# Altium PCB PCB_4550.PcbDoc
Units mil, origin at the board's own origin, x right, y up, seen from the top; angles counter-clockwise.
Board outline 4520.65 x 4320 mil, 2 copper layers (Top Layer, Bottom Layer); 48 components, 76 nets, 250 pads, 83 vias.
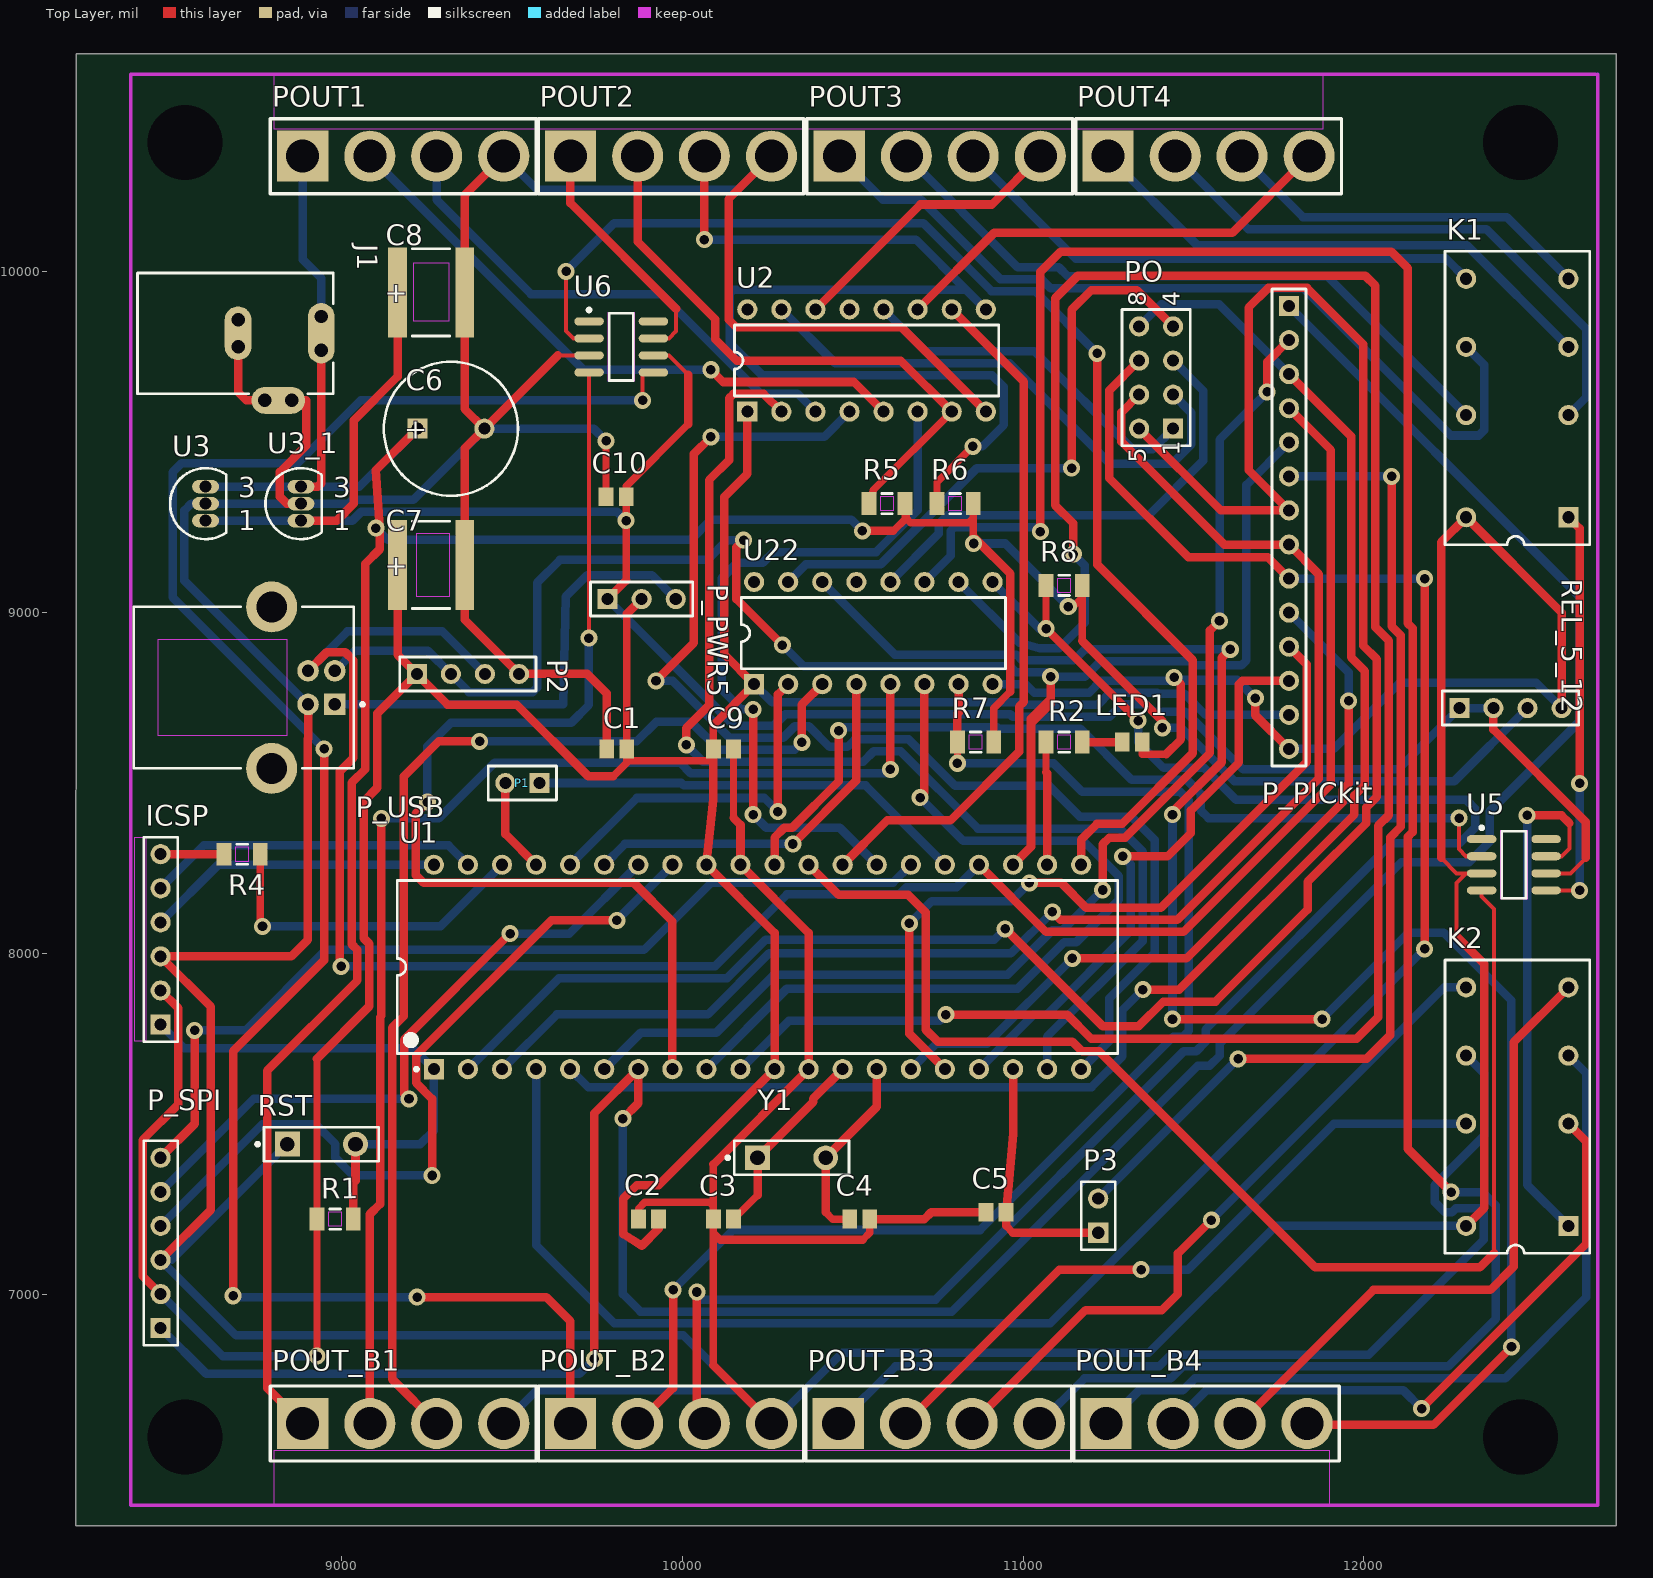
[diagram p0: Top Layer view]
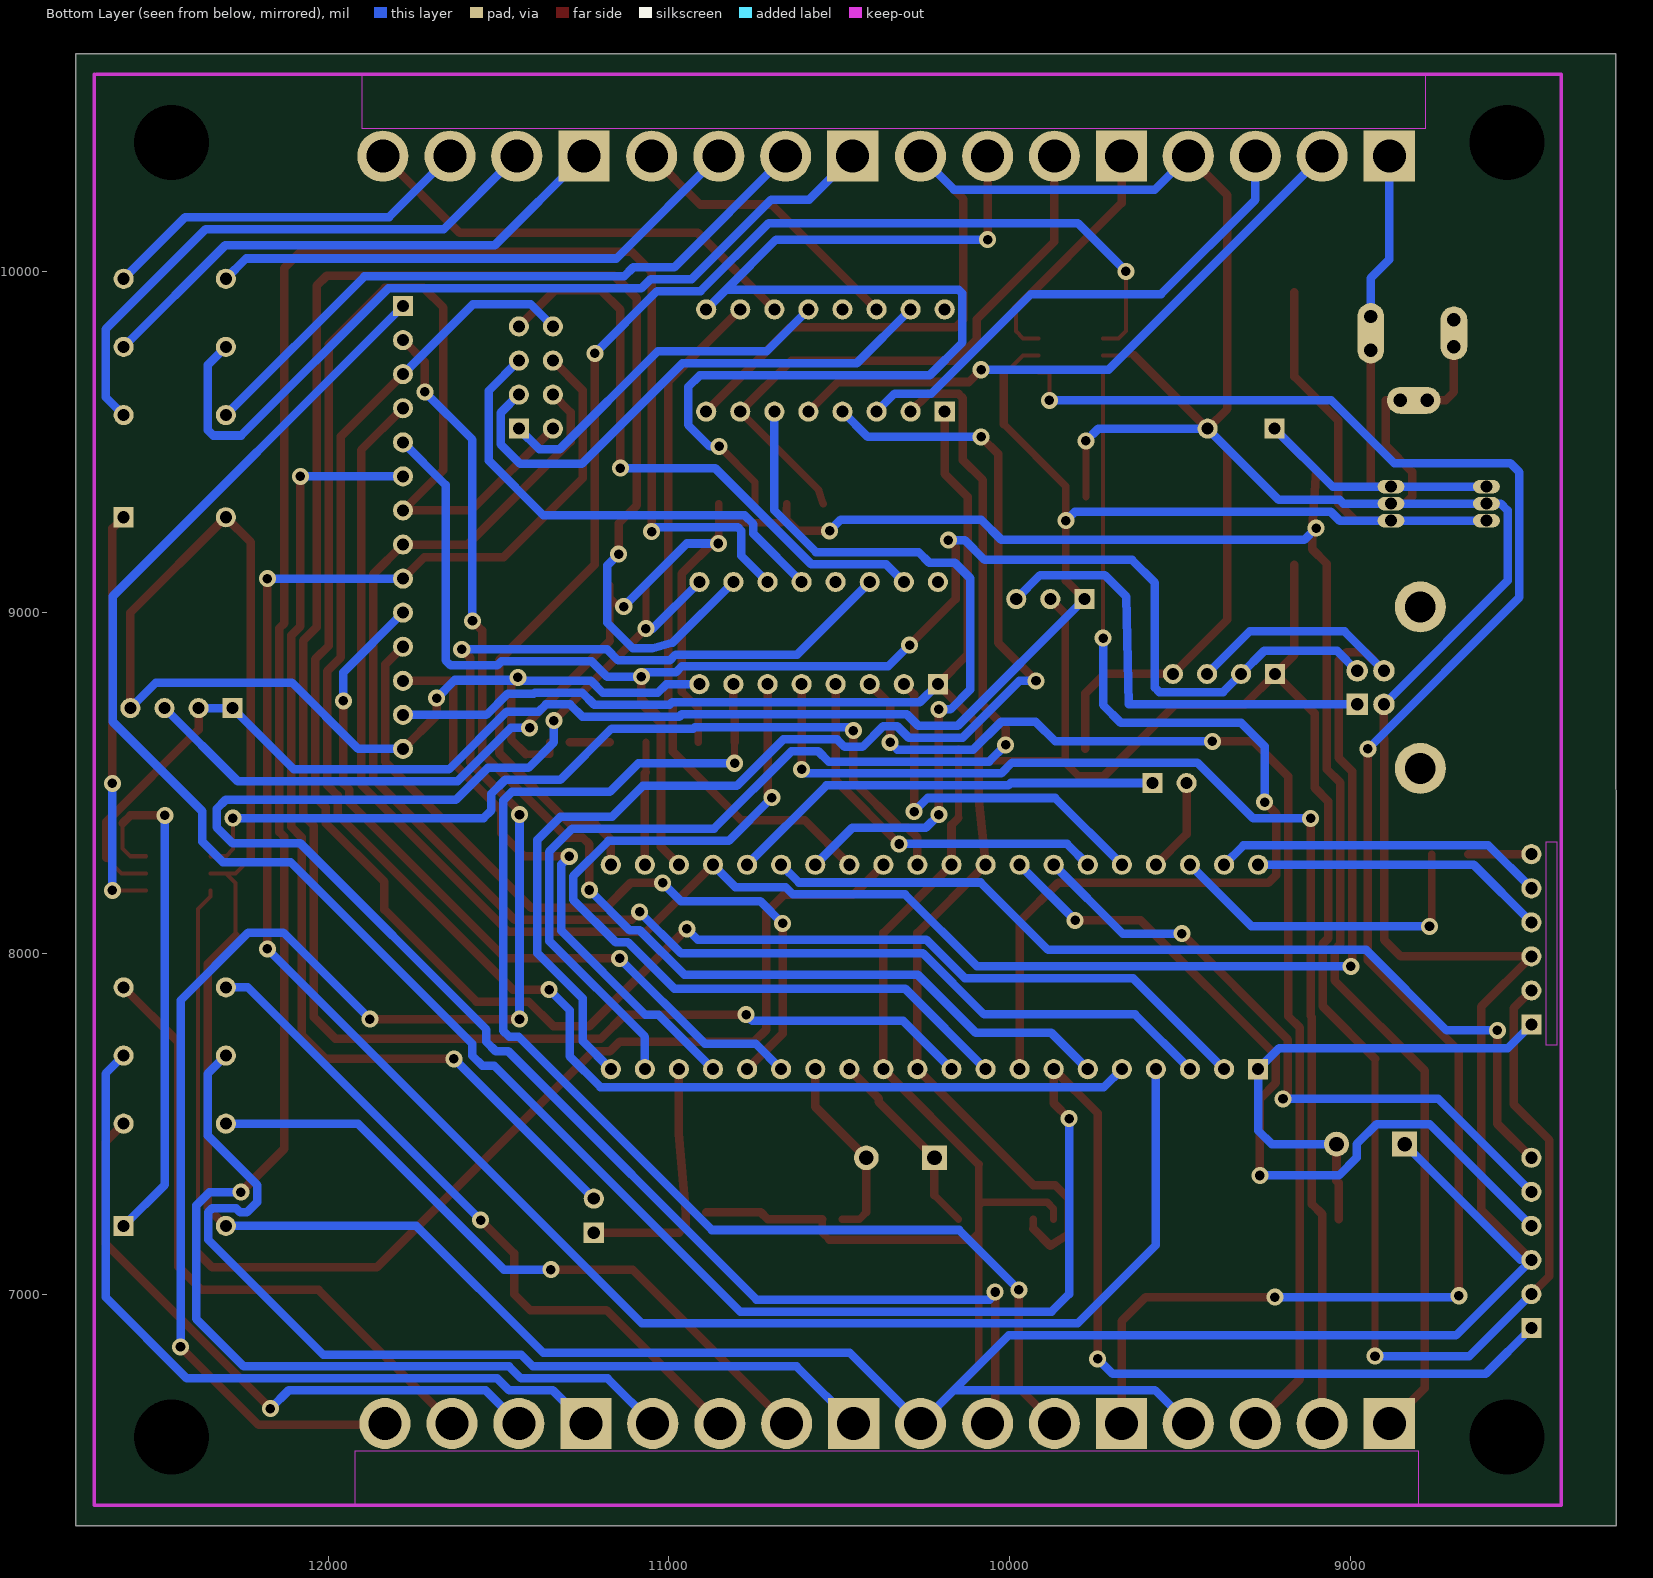
[diagram p1: Bottom Layer view, seen from below]

## Layer stack, top to bottom
Top Layer: signal copper 1.4
Dielectric: dielectric 12.6, FR-4, Dk 4.8
Bottom Layer: signal copper 1.4

## Board outline
8220,10640 12740,10640 12740,6320 8219.35,6320

## Design rules (kind name [scope] priority, off if disabled: settings)
Clearance [All] p1: gap=10
DiffPairsRouting [All] p1: maxlimit=20 minlimit=10 mostfreqgap=20 maxuncoupledlength=500
PolygonConnect [All] p1: connectstyle=Relief reliefconductorwidth=10 reliefentries=4 polygonreliefangle="90 Angle"
RoomDefinition Sheet4550_2 [InComponentClass('Sheet4550_2')] p1: confinementstyle=ConfineIn formatcopy=TRUE lockcomponents=FALSE outline 12820,8920 13960,8920 13960,8320 12820,8320
RoomDefinition Sheet4550_1 [InComponentClass('Sheet4550_1')] p2: confinementstyle=ConfineIn formatcopy=TRUE lockcomponents=FALSE outline 12800,8200 13980,8200 13980,7600 12800,7600
RoomDefinition Sheet4550 [InComponentClass('Sheet4550')] p3: confinementstyle=ConfineIn formatcopy=TRUE lockcomponents=FALSE outline 12840,7000 13920,7000 13920,7380 12840,7380
RoutingVias [All] p1: holewidth=28 width=50 viastyle="Through Hole" minholewidth=28 minwidth=50 maxholewidth=28 maxwidth=50
SMDNeckDown [All] p1: percent=50.000
SilkscreenOverComponentPads [All] p1: minsilkscreentomaskgap=10
SolderMaskExpansion [All] p1: expansion=4
ViasUnderSMD [All] p1 off: allowed=FALSE
Width [All] p1: maxlimit=25 minlimit=10 preferedwidth=25
26 further rules are at their usual default settings.

## Classes and differential pairs
component class Sheet4550: C3 C4 C5 C6 C8 C10 J1 LED1 P1 P3 P_PICkit P_SPI R2 U1 U3 U3_1 Y1
component class Sheet4550_2: B9834809 C1 C2 C7 C9 ICSP K1 K2 P2 P_PWR5 P_USB PO POUT3 POUT4 POUT_B3 POUT_B4 R1 R4 RST U5
component class Sheet4550_1: POUT1 POUT2 POUT_B1 POUT_B2 R5 R6 R7 R8 REL_5_12 U2 U6 U22

## Components (designator, comment, footprint, x,y, rotation, side; value= is the part's Value field where it differs from the comment)
C1 "100n" CAPC2012L 9806.77,8600 r0 top
C2 "100n" CAPC2012L 9900,7220 r0 top
C3 "20pF" CAPC2012L 10120,7220 r0 top
C4 "20pF" CAPC2012L 10520,7220 r180 top
C5 "470n" CAPC2012L 10920,7240 r0 top
C6 "220mF" CAPPR5-10x12.5 9320,9540 r0 top
C7 "10mF" CAPC5764L 9261.93,9140 r0 top
C8 "100mF" CAPC5764L 9261.93,9940 r0 top
C9 "100n" CAPC2012L 10120,8600 r180 top
C10 "100n" CAPC2012L 9804.87,9340 r0 top
ICSP "Header 6" HDR1X6 8468,7791 r90 top
J1 "PWR2.5" KLD-0202 8400,9820 r0 top
K1 "Relay-DPDT" DIP-16-KEY 12600,9280 r90 top
K2 "Relay-DPDT" DIP-16-KEY 12600,7200 r90 top
LED1 "LED2" CAPC2012L 11320,8620 r0 top
P1 "Header 2" HDR1X2 9580,8500 r180 top
P2 "USB" HDR1X4 9220,8820 r0 top
P3 "Header 2" HDR1X2 11220,7180 r90 top
P_PICkit "Header 14" HDR1X14 11780,9900 r270 top
P_PWR5 "Header 3" HDR1X3 9780,9040 r0 top
P_SPI "Header 6" HDR1X6 8468,6900 r90 top
P_USB "Header USB" USB2.5-2H4D 8940,8780 r180 top
PO "Header 4X2A" HDR2X4_CEN 11440,9540 r90 top
POUT1 "Big1" BIG4 8900,10340 r180 top
POUT2 "Big1" BIG4 9686,10340 r180 top
POUT3 "Big1" BIG4 10475,10340 r180 top
POUT4 "Big1" BIG4 11264,10340 r180 top
POUT_B1 "Big1" BIG4 8900,6620 r180 top
POUT_B2 "Big1" BIG4 9686,6620 r180 top
POUT_B3 "Big1" BIG4 10472,6620 r180 top
POUT_B4 "Big1" BIG4 11258,6620 r180 top
R1 "10K" RESC3216L 8980,7220 r180 top
R2 "470" RESC3216L 11120,8620 r0 top
R4 "470" RESC3216L 8707,8291 r180 top
R5 "10K" RESC3216L 10600,9320 r0 top
R6 "10K" RESC3216L 10800,9320 r0 top
R7 "10K" RESC3216L 10860,8620 r0 top
R8 "10K" RESC3216L 11120,9080 r0 top
REL_5_12 "Header 4" HDR1X4 12280,8720 r0 top
RST "SW-PB" SPST-2 8940,7440 r0 top
U1 "PIC18F4550-I/P" PDIP600-P40 10220,7960 r90 top
U2 "MC14050BCP" 648-08 10540,9740 r0 top
U3 "MC78L05ABP" 29-04 8600,9320 r0 top
U3_1 "MC78L05ABP" 29-04 8880,9320 r0 top
U5 "TC4427AEOA" SOIC-OA8_N 12440,8260 r0 top
U6 "TC4427AEOA" SOIC-OA8_N 9820,9780 r0 top
U22 "MC14050BCP" 648-08 10560,8940 r0 top
Y1 "20Mhz" SPST-2 10320,7400 r0 top

## Footprints (in the part's own frame and the unit in brackets; to place one, negate y for a bottom-side part, rotate by r counter-clockwise, add the part's x,y. Pads: shape width x height; smd on the part's side, far side on the other; paste and mask are expansions set on the pad)
29-04 [mm] "TO, Flat Index; 3 In-Line, Axial Leads; Body Dia. 4.8mm; Leads 0.48 x 0.51 mm (max)"
  oval 2x1 hole 0.9: 1(0,-1.27) 2(0,0) 3(0,1.27)
  silkscreen extent -2.65,-2.65 1.55,2.65
648-08 [mm] "DIP; 16 Leads; Row Spacing 7.62 mm; Pitch 2.54 mm"
  rect 1.5x1.5 hole 0.9: 1(-8.89,-3.81)
  round 1.5 hole 0.9: 2(-6.35,-3.81) 3(-3.81,-3.81) 4(-1.27,-3.81) 5(1.27,-3.81) 6(3.81,-3.81) 7(6.35,-3.81) 8(8.89,-3.81) 9(8.89,3.81) 10(6.35,3.81) 11(3.81,3.81) 12(1.27,3.81) 13(-1.27,3.81) 14(-3.81,3.81) 15(-6.35,3.81) 16(-8.89,3.81)
  silkscreen extent -9.85,-2.65 9.85,2.65
BIG4 [mil]
  rect 150x150 hole 97: 1(15,0)
  round 150 hole 97: 2(-182,0) 3(-378,0) 4(-575,0)
  silkscreen extent -670,-110 110,110
CAPC2012L [mm] "Chip Capacitor, Body 2.0x1.3mm, IPC High Density"
  rect 1.1x1.4 smd: 1(-0.75,0) 2(0.75,0)
  body extent -1.1,-0.72 1.1,0.72, height 1.4
CAPC5764L [mm] "Chip Capacitor, Body 5.7x6.4mm, IPC High Density"
  rect 1.4x6.7 smd: 1(-2.5,0) 2(2.5,0)
  silkscreen extent -1.4,-3.25 1.4,3.25, body extent -2.95,-3.4 2.95,3.4, height 1.4
CAPPR5-10x12.5 [mm] "Capacitor, Electrolytic, Radial; Body 10 x 12.5 mm (Dia.xH typ); Pin Spacing 5 mm (typ)"
  rect 1.5x1.5 hole 0.9: 1(-2.5,0)
  round 1.5 hole 0.9: 2(2.5,0)
  silkscreen extent -5,-5 5,5
DIP-16-KEY [mm]
  rect 1.5x1.5 hole 0.9: 1(0,0)
  round 1.5 hole 0.9: 4(7.62,0) 6(12.7,0) 8(17.78,0) 9(17.78,7.62) 11(12.7,7.62) 13(7.62,7.62) 16(0,7.62)
  silkscreen extent -2.05,-1.59 19.83,9.2
HDR1X2 [mm] "Connector; Header; 2 Position"
  rect 1.5x1.5 hole 0.9: 1(0,0)
  round 1.5 hole 0.9: 2(2.54,0)
  silkscreen extent -1.27,-1.27 3.81,1.27
HDR1X3 [mm] "Connector; Header; 3 Position"
  rect 1.5x1.5 hole 0.9: 1(0,0)
  round 1.5 hole 0.9: 2(2.54,0) 3(5.08,0)
  silkscreen extent -1.27,-1.27 6.35,1.27
HDR1X4 [mm]
  rect 1.5x1.5 hole 0.9: 1(0,0)
  round 1.5 hole 0.9: 2(2.54,0) 3(5.08,0) 4(7.62,0)
  silkscreen extent -1.27,-1.27 8.89,1.27
HDR1X6 [mm] "Connector; Header; 6 Position"
  rect 1.5x1.5 hole 0.9: 1(0,0)
  round 1.5 hole 0.9: 2(2.54,0) 3(5.08,0) 4(7.62,0) 5(10.16,0) 6(12.7,0)
  silkscreen extent -1.27,-1.27 13.97,1.27
HDR1X14 [mm] "Connector; Header; 14 Position"
  rect 1.5x1.5 hole 0.9: 1(0,0)
  round 1.5 hole 0.9: 2(2.54,0) 3(5.08,0) 4(7.62,0) 5(10.16,0) 6(12.7,0) 7(15.24,0) 8(17.78,0) 9(20.32,0) 10(22.86,0) 11(25.4,0) 12(27.94,0) 13(30.48,0) 14(33.02,0)
  silkscreen extent -1.27,-1.27 34.29,1.27
HDR2X4_CEN [mm] "Connector; Header; 4x2 Position"
  rect 1.5x1.5 hole 0.9: 1(0,0)
  round 1.5 hole 0.9: 2(2.54,0) 3(5.08,0) 4(7.62,0) 5(0,2.54) 6(2.54,2.54) 7(5.08,2.54) 8(7.62,2.54)
  silkscreen extent -1.27,-1.27 8.89,3.81
KLD-0202 [mm]
  oval 2x4.5 all layers, no hole: 1(13.7,0)
  round 1.5 hole 1: 1A(13.7,-1.25) 1B(13.7,1.25) 2A(7.5,-1) 2B(7.5,1) 3A(9.5,-5) 3B(11.5,-5)
  oval 2x4 all layers, no hole: 2(7.5,0)
  oval 4x2 all layers, no hole: 3(10.5,-5)
  silkscreen extent 0,-4.5 14.6,4.5
PDIP600-P40 [mm] "DIP, 40-Leads, Row Spacing 15.24mm, Pitch 2.54mm, Body 51.8x13.5mm"
  rect 1.5x1.5 hole 0.9: 1(-7.62,24.13)
  round 1.5 hole 0.9: 2(-7.62,21.59) 3(-7.62,19.05) 4(-7.62,16.51) 5(-7.62,13.97) 6(-7.62,11.43) 7(-7.62,8.89) 8(-7.62,6.35) 9(-7.62,3.81) 10(-7.62,1.27) 11(-7.62,-1.27) 12(-7.62,-3.81) 13(-7.62,-6.35) 14(-7.62,-8.89) 15(-7.62,-11.43) 16(-7.62,-13.97) 17(-7.62,-16.51) 18(-7.62,-19.05) 19(-7.62,-21.59) 20(-7.62,-24.13) 21(7.62,-24.13) 22(7.62,-21.59) 23(7.62,-19.05) 24(7.62,-16.51) 25(7.62,-13.97) 26(7.62,-11.43) 27(7.62,-8.89) 28(7.62,-6.35) 29(7.62,-3.81) 30(7.62,-1.27) 31(7.62,1.27) 32(7.62,3.81) 33(7.62,6.35) 34(7.62,8.89) 35(7.62,11.43) 36(7.62,13.97) 37(7.62,16.51) 38(7.62,19.05) 39(7.62,21.59) 40(7.62,24.13)
  silkscreen extent -7.74,-26.85 6.45,26.85, body extent -7.3,-26.85 7.3,26.85, height 6.35
RESC3216L [mm] "Chip Resistor, Body 3.1x1.6mm, IPC High Density"
  rect 1.1x1.7 smd: 1(-1.35,0) 2(1.35,0)
  silkscreen extent -0.4,-0.75 0.4,0.75, body extent -1.68,-0.87 1.68,0.87, height 2.54
SOIC-OA8_N [mm] "SOIC, 8-Leads, Body 4.9x3.9mm, Pitch 1.27mm, IPC Medium Density"
  oval 2.2x0.6 smd: 1(-2.4,1.905) 2(-2.4,0.635) 3(-2.4,-0.635) 4(-2.4,-1.905) 5(2.4,-1.905) 6(2.4,-0.635) 7(2.4,0.635) 8(2.4,1.905)
  silkscreen extent -2.52,-2.5 0.9,2.88, body extent -2,-2.5 2,2.5, height 1.75
SPST-2 [mm] "Circuit Breaker; 2 Leads"
  rect 1.85x1.85 hole 1.1: 1(-2.54,0)
  round 1.85 hole 1.1: 2(2.54,0)
  silkscreen extent -4.89,-1.27 4.28,1.27
USB2.5-2H4D [mm] "Connector; USB1.1, Type B, Thru-Hole; 4 Position; Right Angle"
  rect 1.6x1.6 hole 0.92: 1(-1,1.25)
  round 1.6 hole 0.92: 2(-1,-1.25) 3(1,-1.25) 4(1,1.25)
  round 3.8 hole 2.3: 5(3.71,6.02) 6(3.71,-6.02)
  silkscreen extent -3.18,-6.02 13.99,6.02, body extent -2.41,-6.02 13.99,6.02, height 11.1

## Part data
C1 C2 C3 C4 C5 C9 C10: library part "Cap Semi", "Capacitor (Semiconductor SIM Model)"
C6 C7 C8: library part "Cap Pol1", "Polarized Capacitor (Radial)"
ICSP P_SPI: "Header, 6-Pin"
J1: "DC Power Jack, 2.5mm, KLD Series, PCB Mount"
K1 K2: "Dual-Pole Dual-Throw Relay"
LED1: "Typical RED, GREEN, YELLOW, AMBER GaAs LED"
P1 P3: "Header, 2-Pin"
P2 POUT1 POUT2 POUT3 POUT4 POUT_B1 POUT_B2 POUT_B3 POUT_B4: library part "Header 4", "Header, 4-Pin"
P_PICkit: "Header, 14-Pin"
P_PWR5: "Header, 3-Pin"
P_USB: library part Header_USB, "Header, 4-Pin"
PO: "Header, 4-Pin, Dual row"
R1 R2 R4 R5 R6 R7 R8: library part "Res Semi", "Semiconductor Resistor"
REL_5_12: "Header, 4-Pin"
RST: "Switch"
U1: "High Performance, Enhanced Flash, USB Microcontroller with nanoWatt Technology, 32K Flash, 40-Pin PDIP, Industrial Temperature Range"
U2 U22: "Hex Non-Inverting Buffer"
U3 U3_1: "Three-Terminal Low Current Positive Voltage Regulator"
U5 U6: "1.5A Dual High-Speed Power MOSFET Driver, Non-Inverting, Industrial Temperature"
Y1: library part XTAL, "Crystal Oscillator"

## Free pads (board coordinates)
  round 60 hole 220: 0(8540,6580) 0(8540,10380) 0(12460,6580) 0(12460,10380)

## Via types
v1: diameter 50, hole 28, Top Layer to Bottom Layer, 83 vias

## Nets (pads, with @x,y where several pads share a name; then routed paths per layer and width w, separated by ;. In a path a pad name is that pad's centre, name@x,y a point inside that pad or via, vN(x,y) a via of type N, cw(c..) or ccw(c..) an arc to the next point about the centre after c; other vN are vias at no path point)
+5: C8.1 C10.2 P_PWR5.1 REL_5_12.1 REL_5_12.2 U3.1 U3_1.1 U5.6 U6.6 | length 6683.4
  Top Layer w11.81: U6.6 9960,9755 10016,9699 ; U5.6 12606,8235 12651,8280
  Top Layer w21.65: 9834.39,9094.39 v1(9834.39,9270) ; 10016,9553 9834.39,9371.39 C10.2 ; v1(9834.39,9270) C10.2 ; v1(9834.39,9270) C10.2
  Top Layer w25: U3_1.1 8985,9270 9035,9320 9035,9564.5 9163.5,9693 C8.1 ; P_PWR5.1 9834.39,9094.39 ; 10016,9553 10016,9699 ; REL_5_12.2 12380,8657 12651,8386 12651,8280
  Bottom Layer w25: U3.1 U3_1.1 9030.6,9270 9057,9296.4 9807.99,9296.4 v1(9834.39,9270) ; P_PWR5.1 10151.83,8668.17 10267.61,8668.17 10301.24,8701.8 10962.01,8701.8 10969.31,8694.5 11253.5,8694.5 11289.5,8730.5 11360.5,8730.5 11381.5,8709.5 11475.5,8709.5 11645,8540 12100,8540 REL_5_12.1 REL_5_12.2
+12: C6.1 J1.1 J1.1A J1.1B POUT1.1 POUT_B1.1 R5.2 R6.2 R7.2 R8.2 REL_5_12.3 U3.3 U3_1.3 | length 9893.1
  Top Layer w21.65: 10619.07,9240 10656.11,9277.04 ; v1@10853.15,9222.85 10853.15,9277.15 ; R7.2 10913.15,8719.57 10962.03,8768.45 ; v1(11132,9018) 11147.15,9018 11173.15,9044 ; 11173.15,8916.85 11173.15,9044 ; 10656.11,9277.04 10669.15,9264 10840,9264 10853.15,9277.15 ; 10656.11,9277.04 10653.15,9280 R5.2 10656.11,9277.04 ; 10853.15,9277.15 R6.2 10853.15,9277.15 ; 11173.15,9044 R8.2 11173.15,9044
  Top Layer w25: U3_1.3 8929.37,9370 8939.37,9380 J1.1A J1.1 J1.1B ; POUT_B1.1 8781,6724 8781,7656 9045.5,7920.5 9045.5,8010 9029,8026.5 9029,8501 9069,8541 9069,9144 9111,9186 v1@9111,9248 ; v1(9100,9248) v1@9111,9248 ; C6.1 9100,9418.43 9110.95,9248.71 v1@9111,9248 ; v1(10528,9240) 10619.07,9240 ; v1(10854,9203) 10853.15,9222.85 10863.5,9212.5 10962.03,9113.97 10962.03,8768.45 ; 11173.15,8916.85 11408,8682 v1(11408,8662)
  Bottom Layer w25: U3.3 U3_1.3 9051.57,9370 C6.1 ; POUT1.1 8885,10036.37 8939.37,9982 J1.1B J1.1 ; v1(9100,9248) 9134,9214 10024,9214 10083,9273 10495,9273 v1(10528,9240) ; v1(10854,9203) 10947,9203 v1(11132,9018) ; v1(11408,8662) 11463,8662 11620,8505 12265,8505 REL_5_12.3
GND: C1.1 C2.1 C3.1 C4.1 C5.1 C6.2 C7.2 C8.2 C9.1 C10.1 ICSP.3 J1.2 J1.2A J1.2B J1.3 J1.3A J1.3B K1.16 K2.16 LED1.2 P2.4 P_PICkit.14 P_SPI.3 P_USB.4 POUT1.4 POUT2.4 POUT_B1.4 POUT_B2.4 REL_5_12.4 RST.1 U1.12 U1.31 U2.8 U3.2 U3_1.2 U5.3 U6.3 U22.8 | length 24771.5
  Top Layer w11.81: 9633.43,9755 U6.3 ; 12227,8280 12272,8235 12300,8235 ; 12271,8051 12271,8206 12300,8235 ; 12300,8235 U5.3 12300,8235
  Top Layer w21.65: C10.1 v1(9775.34,9504) ; C2.1 9870.47,7250 9889.47,7269 10080,7269 10090.47,7258.53 ; 10090.47,6790.53 10090.47,7180 ; 10090.47,7380.47 10090.47,7258.53 ; 10110.47,7160 10090.47,7180 ; 10149.53,8397.6 C9.1 ; 10529.53,7160 10549.53,7180 C4.1 ; LED1.2 11349.53,8584.47 11419.15,8584.47 ; 10090.47,7180 C3.1 ; 10090.47,7180 C3.1 ; C3.1 10090.47,7258.53 ; C3.1 10090.47,7258.53
  Top Layer w25: P_SPI.3 8615.5,7247.5 8615.5,7843.5 ICSP.3 8851.63,7991 8900.5,8039.87 8900.5,8629.37 8900.63,8629.5 P_USB.4 ; J1.2B J1.2 ; U3_1.2 8838,9320 8818,9340 8818,9413 8895,9490 8895,9623.15 J1.3B J1.3 J1.3A 8720,9623.15 8695.28,9647.87 J1.2A ; POUT1.4 9360.35,10225.35 C8.2 9360.35,9598.07 C6.2 ; 9633.43,9755 C6.2 ; C1.1 9777.24,8762.76 9720,8820 P2.4 9360.35,8979.65 C7.2 9360.35,9481.93 C6.2 ; 10090.47,6790.53 POUT_B2.4 ; 10090.47,7380.47 U1.12 10370,8060 U1.31 10170,8377.13 10149.53,8397.6 ; 10110.47,7160 10529.53,7160 ; POUT2.4 10135,10214 10135,9860 10157.03,9837.97 10642.03,9837.97 U2.8 ; C4.1 10710,7220 10730,7240 C5.1 ; 11419.15,8584.47 11462.5,8627.83 11462.5,8790.5 v1(11443,8810) ; v1(11681,8749) 11681,8699 P_PICkit.14 ; 12227,8280 12227,9207 K1.16 12580,9000 REL_5_12.4 ; 12271,8051 12353,7969 12353,7253 K2.16 ; J1.2A J1.2 ; J1.2A J1.2
  Bottom Layer w25: J1.3A J1.3@8792.15,9623.15 ; RST.1 8500,7100 P_SPI.3 8689.36,6878.64 10002.36,6878.64 10163,6718 ; J1.3B J1.3 ; P_USB.4 8538,9093.42 8538,9300 8558,9320 U3.2 U3_1.2 9019.6,9320 9031,9331.4 9209.83,9331.4 C6.2 9739.34,9540 v1(9775.34,9504) ; POUT_B1.4 9573,6718 10163,6718 ; POUT1.4 9573,10242 10163,10242 POUT2.4 ; U22.8 11007,8790 11032.5,8764.5 11193,8764.5 11229,8800.5 11443,8800.5 11629.5,8800.5 ; v1(11443,8810) 11450.45,8802.55 11627.45,8802.55 11629.5,8800.5 ; P_PICkit.14 11911.44,8600 12106.13,8794.69 12505.31,8794.69 REL_5_12.4 ; K2.16 11741,7200 11368,6827 10468,6827 POUT_B2.4 ; J1.3@8792.15,9623.15 J1.3 ; J1.3@8792.15,9623.15 J1.3 ; 10163,6718 POUT_B2.4 ; 10163,6718 POUT_B2.4 ; 11629.5,8800.5 v1(11681,8749) 11629.5,8800.5
NetC3_2: C3.2 U1.13 Y1.1 | length 572.7
  Top Layer w21.65: C3.2 10220,7290.47
  Top Layer w25: 10220,7290.47 Y1.1 10383.76,7563.76 10383.76,7573.76 U1.13
NetC4_2: C4.2 U1.14 Y1.2 | length 560.9
  Top Layer w21.65: 10420,7240 10440,7220 C4.2
  Top Layer w25: 10420,7240 Y1.2 10570,7550 U1.14
NetC5_2: C5.2 P3.1 U1.18 | length 739.7
  Top Layer w21.65: 10949.53,7200 10969.53,7180
  Top Layer w25: 10949.53,7200 C5.2 10970,7470.47 U1.18 ; 10969.53,7180 P3.1
NetICSP_1: ICSP.1 R1.1 RST.2 U1.1 | length 1505.7
  Top Layer w25: R1.1 9033.15,7326 9040,7332.85 RST.2
  Bottom Layer w25: ICSP.1 8537,7722 9208,7722 U1.1 9270,7480 9230,7440 RST.2
NetICSP_4: ICSP.4 U1.40 | length 872
  Bottom Layer w25: ICSP.4 8637,8260 U1.40
NetICSP_5: ICSP.5 U1.39 | length 977.8
  Bottom Layer w25: ICSP.5 8594,8317 9313,8317 U1.39
NetICSP_6: ICSP.6 R4.2 | length 185.9
  Top Layer w25: ICSP.6 R4.2
NetK1_1: K1.1 U5.5 | length 1207.2
  Top Layer w11.81: U5.5 v1(12633,8185)
  Top Layer w25: K1.1 12633,9247 v1(12633,8499)
  Bottom Layer w25: v1(12633,8185) v1(12633,8499)
NetK1_4: K1.4 POUT4.2 | length 1691.4
  Bottom Layer w25: POUT4.2 11660,10126 12359,10126 12653,9832 12653,9633 K1.4
NetK1_6: K1.6 POUT4.1 | length 1583
  Bottom Layer w25: POUT4.1 11510.5,10078.5 12301.5,10078.5 K1.6
NetK1_8: K1.8 POUT4.3 | length 1107.1
  Bottom Layer w25: POUT4.3 11821,10161 12419,10161 K1.8
NetK1_9: K1.9 POUT3.3 | length 1596.1
  Bottom Layer w25: POUT3.3 11153.5,10039.5 12240.5,10039.5 K1.9
NetK1_11: K1.11 POUT3.1 | length 2505.2
  Bottom Layer w25: POUT3.1 10588,10212 10699.73,10212 10933,9978.73 11053.27,9978.73 11079.97,9952.03 11822.97,9952.03 12255,9520 12337,9520 12353,9536 12353,9727 K1.11
NetK1_13: K1.13 POUT3.2 | length 1957.8
  Bottom Layer w25: POUT3.2 10983.27,10013.73 11104.28,10013.73 11130.98,9987.03 11892.97,9987.03 K1.13
NetK2_1: K2.1 U5.7 | length 1540.7
  Top Layer w11.81: U5.7 12580,8285 12603,8308 12603,8382
  Top Layer w25: v1(12479,8405) 12580,8405 12603,8382
  Bottom Layer w25: v1(12479,8405) 12479,7321 K2.1
NetK2_4: K2.4 POUT_B4.2 | length 1850
  Top Layer w25: v1(12169,6664) 12653,7148 12653,7447 K2.4
  Bottom Layer w25: POUT_B4.2 11537.5,6717.5 12115.5,6717.5 v1(12169,6664)
NetK2_6: K2.6 POUT_B4.1 | length 2294.6
  Bottom Layer w25: POUT_B4.1 11340.5,6717.5 11468.5,6717.5 11503.5,6752.5 12414.5,6752.5 12653,6991 12653,7647 K2.6
NetK2_8: K2.8 POUT_B4.3 | length 1880.2
  Top Layer w25: POUT_B4.3 12028,7012 12371,7012 12439,7080 12439,7739 K2.8
NetK2_9: K2.9 POUT_B3.3 | length 2049.9
  Top Layer w25: POUT_B3.3 11183,6953 11407,6953 11454,7000 11454,7119 v1(11552,7217)
  Bottom Layer w25: v1(11552,7217) 12235,7900 K2.9
NetK2_11: K2.11 POUT_B3.1 | length 2877.2
  Bottom Layer w25: POUT_B3.1 10624.5,6787.5 11398.5,6787.5 11433.5,6822.5 12014.53,6822.5 12352.03,7160 12352.03,7240 12340,7252.03 12270,7252.03 12257.97,7240 12237.97,7240 12208,7269.97 12208,7320 12353,7465 12353,7647 K2.11
NetK2_13: K2.13 POUT_B3.2 | length 2010.5
  Top Layer w25: POUT_B3.2 11106,7072 v1(11346,7072)
  Bottom Layer w25: v1(11346,7072) 11484,7072 11912,7500 K2.13
NetLED1_1: LED1.1 R2.2 | length 117.3
  Top Layer w25: R2.2 LED1.1
NetP1_1: P1.1 U1.25 | length 1289.4
  Bottom Layer w25: P1.1 9996,8500 10003,8493 10537,8493 U1.25
NetP1_2: P1.2 U1.37 | length 277.3
  Top Layer w25: P1.2 9480,8350 U1.37
NetP2_2: P2.2 P_PICkit.5 P_USB.2 U1.23 | length 5255.1
  Top Layer w25: v1(10179,9213) 10157.97,9191.97 10157.97,9040 v1(10293,8904.97) ; U1.23 11022.69,8312.69 ; 11022.69,8312.69 11022.69,8674.69 ; 11022.69,8312.69 11022.69,8674.69 ; 11022.69,8674.69 11080,8732 11080,8746.31 ; 11022.69,8674.69 11022.69,8689 11080,8746.31 ; 11080,8746.31 v1(11080,8812) 11080,8746.31
  Bottom Layer w25: P_USB.2 9038.16,8888 9252,8888 P2.2 9373,8767 9560,8767 9573,8780 9573,9088 9640,9155 10073,9155 10131,9213 v1(10179,9213) ; v1(10293,8904.97) 10355.94,8842.03 10962.03,8842.03 10979.06,8825 11067,8825 v1(11080,8812) 11181,8812 11226.5,8857.5 11491,8857.5 11503.5,8845 11640,8845 11655,8860 11655,9375 P_PICkit.5
NetP2_3: P2.3 P_PICkit.4 P_USB.3 U1.24 | length 6145.7
  Top Layer w25: P_USB.3 8955.42,8884 9010,8884 9034,8860 9034,8574.3 8994,8534.3 8994,7966 v1(8998,7962) ; U1.24 11067,8063 11470,8063 11903,8496 11903,9477 P_PICkit.4
  Bottom Layer w25: P_USB.3 9016.42,8945 9295,8945 P2.3 ; v1(8998,7962) 10095.43,7962 10306.41,8172.97 10635.45,8172.97 10657.03,8194.55 10804.55,8194.55 U1.24
NetP3_2: P3.2 P_PICkit.6 | length 3020.4
  Top Layer w25: v1(11630.45,7690.45) 12007.45,7690.45 12077.03,7760.03 12077.03,8340.49 12107.5,8370.96 12107.5,8933.5 12081,8960 v1(12081,9400)
  Bottom Layer w25: P3.2 v1(11630.45,7690.45) ; P_PICkit.6 v1(12081,9400)
NetP_PICkit_1: P_PICkit.1 P_SPI.1 U1.7 | length 8119.8
  Top Layer w25: v1(9741,6810) 9741,7531 U1.7 9870,7560 v1(9825,7515)
  Bottom Layer w25: P_SPI.1 8602,6766 9697,6766 v1(9741,6810) ; v1(9825,7515) 9825,7000 9876.36,6948.64 10790.64,6948.64 11512.58,7670.58 11547.55,7670.58 11576.97,7700 11576.97,7734.97 12110,8268 12309,8268 12369,8328 12369,8416.97 12632.03,8680 12632.03,9047.97 P_PICkit.1
NetP_PICkit_2: P_PICkit.2 U1.6 | length 3548.7
  Top Layer w25: v1(11233,8186) 11233,8320 11253,8340 11299.5,8340 11547.75,8588.25 11547.75,8947.75 v1(11576,8976) ; v1(11716,9648) 11716,9736 P_PICkit.2
  Bottom Layer w25: U1.6 9877,7767 10099,7767 10269,7937 10954,7937 11085,8068 11115,8068 v1(11233,8186) ; v1(11576,8976) 11576,9508 v1(11716,9648)
NetP_PICkit_3: P_PICkit.3 PO.8 U1.5 | length 4683.1
  Top Layer w25: v1(11351.21,7893.6) 11457.65,7893.6 11972.03,8407.97 11972.03,8463.52 12002.5,8493.99 12002.5,8828.5 11962.5,8868.5 11962.5,9517.5 P_PICkit.3
  Bottom Layer w25: U1.5 9722.5,7607.5 11200.5,7607.5 11291,7698 11291,7833.39 v1(11351.21,7893.6) ; PO.8 11404.74,9904.74 11575.26,9904.74 P_PICkit.3
NetP_PICkit_7: P_PICkit.7 PO.5 U1.2 | length 6268.3
  Top Layer w25: v1(10947,8072) 11233.11,7785.89 11338.5,7785.89 11411.21,7858.6 11564.69,7858.6 11834.51,8128.42 11834.51,8209.98 12007.03,8382.5 12007.03,8428.52 12037.5,8458.99 12037.5,8863.5 11997.5,8903.5 11997.5,9788.5 11833,9953 11719,9953 11661.4,9895.4 11661.4,9418.6 P_PICkit.7 11580,9300 PO.5
  Bottom Layer w25: U1.2 9637,7927 10130.43,7927 10243.93,8040.5 10915.5,8040.5 v1(10947,8072)
NetP_PICkit_8: P_PICkit.8 PO.6 U1.3 | length 4269.7
  Top Layer w25: v1(11085.45,8121.75) 11109.2,8098 11452.05,8098 11867.03,8512.97 11867.03,9112.97 P_PICkit.8 11590,9200 11287.97,9502.03 11287.97,9587.97 PO.6
  Bottom Layer w25: U1.3 9631,7821 10074.59,7821 10253.73,8000.14 10963.84,8000.14 v1(11085.45,8121.75)
NetP_PICkit_9: P_PICkit.9 PO.7 U1.4 | length 6190.8
  Top Layer w25: PO.7 11252.97,9652.97 11252.97,9394.03 11484.08,9162.92 11717.08,9162.92 P_PICkit.9 ; v1(12178,8013) v1(12178,9100)
  Bottom Layer w25: U1.4 9570,7143.64 9800,6913.64 11078.64,6913.64 v1(12178,8013) ; P_PICkit.9 v1(12178,9100)
NetP_PICkit_10: P_PICkit.10 U1.15 | length 2228.3
  Top Layer w25: v1(11144.17,7985) 11479.06,7985 11937.03,8442.97 11937.03,8480.49 11955,8498.46 v1(11955,8741)
  Bottom Layer w25: U1.15 10745.09,7735.09 10894.26,7735.09 v1(11144.17,7985) ; P_PICkit.10 11955,8825 v1(11955,8741)
NetP_PICkit_11: P_PICkit.11 U1.16 | length 2253.8
  Top Layer w25: v1(10666,8088) 10666,7764 U1.16 ; v1(11018,8207) 11111.57,8207 11185.07,8133.5 11403.4,8133.5 11832.03,8562.13 11832.03,8847.97 P_PICkit.11
  Bottom Layer w25: v1(10666,8088) 10731,8153 10964,8153 v1(11018,8207)
NetP_PICkit_12: P_PICkit.12 U1.17 | length 1716.3
  Top Layer w25: v1(11292,8284.42) 11423.21,8284.42 11491.9,8353.1 11491.9,8419.52 11633,8560.63 11633,8790 11643,8800 P_PICkit.12
  Bottom Layer w25: U1.17 11029.28,7819.28 11068.15,7819.28 11315.5,8066.63 11315.5,8260.92 v1(11292,8284.42)
NetP_PWR5_3: P_PWR5.3 P_USB.1 | length 1365.3
  Bottom Layer w25: P_USB.1 9650,8730.79 9657,9047.21 9720,9110.21 9909.79,9110.21 P_PWR5.3
NetP_SPI_4: P_SPI.4 U1.33 | length 2362.3
  Top Layer w25: v1(9265,7348) 9265,7572.97 9217.97,7620 9217.97,7700 9614.97,8097 v1(9807,8097)
  Bottom Layer w25: P_SPI.4 8767,7499 8922,7499 8981,7440 8981,7400 9033,7348 v1(9265,7348) ; v1(9807,8097) U1.33
NetP_SPI_5: P_SPI.5 U1.34 | length 1921.4
  Top Layer w25: v1(9197,7572.97) 9182.97,7587 9182.97,7747.03 v1(9493.94,8058)
  Bottom Layer w25: P_SPI.5 8740.97,7572.97 v1(9197,7572.97) ; v1(9493.94,8058) 9668,8058 U1.34
NetP_SPI_6: P_SPI.6 U1.26 | length 2718.7
  Top Layer w25: P_SPI.6 8568,7500 v1(8568,7774)
  Bottom Layer w25: v1(8568,7774) 8716.96,7774 8952.85,8009.89 9886.67,8009.89 10084.75,8207.97 10617.97,8207.97 U1.26
NetPO_1: PO.1 U2.12 | length 1045
  Bottom Layer w25: U2.12 10713,9767 11032.61,9767 11320,9479.61 11379.61,9479.61 PO.1
NetPO_2: PO.2 U2.15 | length 1582.4
  Bottom Layer w25: U2.15 10448,9732 10960,9732 11255.01,9436.99 11436.26,9436.99 11493,9493.72 11493,9587 PO.2
NetPO_3: PO.3 U22.12 | length 1412.8
  Bottom Layer w25: U22.12 10751.5,9231.5 10751.5,9260 10777,9285.5 11367.78,9285.5 11528,9445.72 11528,9652 PO.3
NetPO_4: PO.4 U22.15 | length 1801.7
  Top Layer w25: v1(11142,9424) 11142,9889 11200,9947 11333,9947 PO.4
  Bottom Layer w25: U22.15 10362.03,9142.03 10581.53,9142.03 10863.5,9424 v1(11142,9424)
NetPOUT1_2: POUT1.2 U2.5 | length 1818.7
  Top Layer w25: v1(10083,9713) 10118.97,9677.03 10502.97,9677.03 U2.5
  Bottom Layer w25: POUT1.2 9709,9713 v1(10083,9713)
NetPOUT1_3: POUT1.3 U2.3 | length 1497.6
  Bottom Layer w25: POUT1.3 9278,10212 9555,9935 9937,9935 10229,9643 10337,9643 U2.3
NetPOUT2_1: POUT2.1 U6.7 | length 717.6
  Top Layer w11.81: U6.7 9960,9805 9981,9826 9981,9892
  Top Layer w25: POUT2.1 9671,10202 9981,9892
NetPOUT2_2: POUT2.2 R5.1 U2.7 | length 1781.4
  Top Layer w21.65: R5.1 10560,9360 U2.7
  Top Layer w25: POUT2.2 9868,10089 10095.47,9861.53 10095.47,9802.97 10158.44,9740 10640,9740 U2.7
NetPOUT2_3: POUT2.3 R6.1 U2.9 | length 3380
  Top Layer w21.65: R6.1 10746.85,9382.85 v1(10852,9488)
  Top Layer w25: v1(10064,10095) POUT2.3
  Bottom Layer w25: v1(10064,10095) 10685,10095 10832,9948 ; v1(10852,9488) 10880,9488 10943,9551 10943,9662.49 10908.49,9697 10233.81,9697 10137.81,9793 10137.81,9936.81 10149,9948 10832,9948 ; 10832,9948 U2.9 10832,9948
NetPOUT3_4: POUT3.4 U2.14 | length 846.4
  Top Layer w25: U2.14 10698,10198 10908,10198 POUT3.4
NetPOUT4_4: POUT4.4 U2.11 | length 1335.4
  Top Layer w25: U2.11 10915,10115 11614,10115 POUT4.4
NetPOUT_B1_2: POUT_B1.2 U22.5 | length 3620.2
  Top Layer w25: POUT_B1.2 9082,7234 9112,7264 9112,7813.14 9115.89,7817.03 v1(9115.89,8395.89) ; v1(10610,8540) U22.5
  Bottom Layer w25: v1(9115.89,8395.89) 9284.39,8395.89 9448.5,8560 9992,8560 10024,8528 10598,8528 v1(10610,8540)
NetPOUT_B1_3: POUT_B1.3 U22.3 | length 3440.7
  Top Layer w25: POUT_B1.3 9147.97,6750.03 9147.97,7782.03 9182,7816.06 9182,8520 9284,8622 v1(9404,8622) ; v1(10350,8619) 10350,8730 U22.3
  Bottom Layer w25: v1(9404,8622) 9865,8622 9923,8680 10024,8680 10106,8598 10329,8598 v1(10350,8619)
NetPOUT_B2_1: POUT_B2.1 U6.5 | length 5613.9
  Top Layer w11.81: v1(9883,9623) 9883,9705 U6.5
  Top Layer w25: v1(8681,6995) 8681,7713 8948,7980 v1(8948,8600) ; v1(9221,6991) 9600,6991 9671,6920 POUT_B2.1
  Bottom Layer w25: v1(8681,6995) 8685,6991 v1(9221,6991) ; v1(8948,8600) 8503,9045 8503,9412 8530,9439 8871,9439 9055,9623 v1(9883,9623)
NetPOUT_B2_2: POUT_B2.2 R7.1 U22.7 | length 3897.2
  Top Layer w21.65: v1(10806.85,8558) R7.1
  Top Layer w25: POUT_B2.2 9972,6724 v1(9972,7012) ; R7.1 10806.85,8703 10810,8706.15 U22.7
  Bottom Layer w25: v1(9972,7012) 10148,7188 10873,7188 11439.55,7754.55 11467.55,7754.55 11485.5,7772.5 11485.5,8449 11460,8474.5 11172.57,8474.5 11089.07,8558 v1(10806.85,8558)
NetPOUT_B2_3: POUT_B2.3 R8.1 U22.9 | length 5212.2
  Top Layer w21.65: v1(11066.85,8953.15) R8.1
  Top Layer w25: v1(10042,7006) 10042,6663 10064,6663 POUT_B2.3 ; v1(11066.85,8953.15) v1(11337,8683)
  Bottom Layer w25: v1(10042,7006) 10042,7000 10058.36,6983.64 10742.38,6983.64 11471.22,7712.48 11507.55,7712.48 11535.07,7740 11535.07,7776.33 12081.74,8323 12280,8323 12327,8370 12327,8424 12300,8451 11624.5,8451 11531,8544.5 11412.06,8544.5 11337,8619.56 v1(11337,8683) ; U22.9 11046.85,8953.15 v1(11066.85,8953.15)
NetPOUT_B3_4: POUT_B3.4 U22.11 | length 7064.4
  Top Layer w25: v1(11050,9238) 11050,10000 11110,10060 12080,10060 12128.5,10011.5 12128.5,8968.5 12142.5,8954.5 12142.5,8355.96 12128.5,8341.96 12128.5,7426.5 v1(12256,7299)
  Bottom Layer w25: U22.11 10786.5,9166.5 10786.5,9240 10797,9250.5 11037.5,9250.5 v1(11050,9238) ; POUT_B3.4 11179.5,6752.5 11433.5,6752.5 11468.5,6787.5 12247.5,6787.5 12387.03,6927.03 12387.03,7260 12348.03,7299 v1(12256,7299)
NetPOUT_B4_4: POUT_B4.4 U22.14 | length 5358.1
  Top Layer w25: v1(11438,7807) v1(11877,7807) ; v1(11438,8407) 11438,8416.2 11582.75,8560.95 11582.75,8867.75 v1(11607.5,8892.5) ; POUT_B4.4 11837,6616 12204,6616 v1(12433,6845)
  Bottom Layer w25: U22.14 10622.97,8877.03 10980,8877.03 10997.03,8860 11148.5,8860 11181,8892.5 v1(11607.5,8892.5) ; v1(11438,7807) v1(11438,8407) ; v1(11877,7807) 12131,8061 12234,8061 12433,7862 v1(12433,6845)
NetR2_1: R2.1 U1.22 | length 361.3
  Top Layer w21.65: 11066.85,8532.18 R2.1
  Top Layer w25: 11066.85,8532.18 11070,8529.03 U1.22
NetR4_1: R4.1 U1.38 | length 992.1
  Top Layer w21.65: v1@8760.15,8086.35 R4.1
  Top Layer w25: v1@8760.15,8086.35 v1(8767,8079.5)
  Bottom Layer w25: v1(8767,8079.5) 9289.5,8079.5 U1.38
NetU1_8: U1.8 U6.4 | length 3135.8
  Top Layer w11.81: v1(9725,8925) 9725,9705 U6.4
  Top Layer w25: v1(9251,8444) 9217,8410 9217,8230 9240,8207 9856.5,8207 9970,8093.5 U1.8
  Bottom Layer w25: v1(9251,8444) 9251,8608 9320,8677 9673,8677 9725,8729 v1(9725,8925)
NetU1_9: U1.9 U22.6 | length 2502.9
  Top Layer w25: v1(10697,8457) 10710,8470 U22.6
  Bottom Layer w25: U1.9 10306,7896 10983.5,7896 11120,8032.5 11155.5,8032.5 11280.5,8157.5 11280.5,8226.5 11177,8330 10824,8330 v1(10697,8457)
NetU1_10: U1.10 U22.10 | length 6613.4
  Top Layer w25: v1(10773,7820) 11129,7820 11199,7750 11979,7750 12042,7813 12042,8375 12072.5,8405.5 12072.5,8918 12033,8957.5 12033,9960 12004,9989 11160,9989 11094,9923 11094,9315 11147,9262 v1(11147,9172)
  Bottom Layer w25: U1.10 10312,7802 10755,7802 v1(10773,7820) ; U22.10 10987.97,8912.03 11049.06,8895 11105,8895 11180,8970 11180,9139 v1(11147,9172)
NetU1_19: U1.19 U2.2 | length 3498.8
  Top Layer w25: v1(10011,8611.75) 10011,8661 10078,8728 10078,9389 10137,9448 10137,9630 10149.03,9642.03 10237.97,9642.03 U2.2
  Bottom Layer w25: v1(10011,8611.75) 10059.75,8563 10531,8563 10561,8593 10640,8593 10867.01,8365.99 11283.01,8365.99 11350.5,8298.5 11350.5,8036.24 11070,7755.74 U1.19
NetU1_20: U1.20 U2.4 | length 3686.1
  Top Layer w25: v1(9922,8800) 10033,8911 10033,9466 v1(10083,9516)
  Bottom Layer w25: v1(9922,8800) 9970.5,8800 10137.5,8633 10295.61,8633 10329.41,8666.8 10370.81,8666.8 10431.61,8606 10484,8606 10506,8628 10664,8628 10800,8492 11075.5,8492 11166.5,8400.99 11318.01,8400.99 11385.5,8333.5 11385.5,8000.44 11252.56,7867.5 11252.56,7742.56 U1.20 ; v1(10083,9516) 10416,9516 U2.4
NetU1_21: U1.21 U6.2 | length 3823.3
  Top Layer w11.81: v1(9658,10002) 9658,9827 9680,9805 U6.2
  Top Layer w25: U1.21 11170,8333.7 11216.42,8380.12 11290.12,8380.12 11497.5,8587.5 11497.5,8860.4 11217,9140.9 v1(11217,9761.01)
  Bottom Layer w25: v1(9658,10002) 9799,10143 10707,10143 10906.27,9943.73 11034.28,9943.73 v1(11217,9761.01)
NetU1_27: U1.27 U2.6 | length 2123.3
  Top Layer w25: v1(10207,8407) v1(10207,8716)
  Bottom Layer w25: v1(10207,8407) 10245.5,8368.5 10461.5,8368.5 U1.27 ; v1(10207,8716) 10173,8716 10115,8774 10115,9101 10160.69,9146.69 10235.5,9146.69 10266.81,9178 10568,9178 10690,9300 U2.6
NetU1_28: U1.28 U2.10 | length 2047.1
  Top Layer w25: U1.28 10600.21,8390.21 10786.17,8390.21 10987.69,8591.73 10987.69,8724.11 11002,8738.42 11002,9678 U2.10
NetU1_29: U1.29 U5.4 | length 3800.6
  Top Layer w11.81: U5.4 12345.51,8166.49 12382,8130 12382,7120
  Top Layer w25: U1.29 10458,8172 10662,8172 10714,8120 10714,7776 10749,7741 11144,7741 11173,7712 11223,7712 11857,7078 12340,7078 12382,7120
NetU1_30: U1.30 U5.2 | length 2615.7
  Top Layer w11.81: v1(12279,8397) 12279,8306 12300,8285 U5.2
  Top Layer w25: U1.30 10270,8340 10298.5,8368.5 10321.85,8368.5 10458,8504.65 v1(10458,8654)
  Bottom Layer w25: v1(10458,8654) 10467.38,8663.38 10923.62,8663.38 10927.5,8659.5 11167.74,8659.5 11317.74,8509.5 11480,8509.5 11520.5,8469 11520.5,8420 11543.5,8397 v1(12279,8397)
NetU1_35: U1.35 U22.4 | length 1125.3
  Top Layer w25: v1(10324,8321) 10510,8507 U22.4
  Bottom Layer w25: U1.35 9831,8321 v1(10324,8321)
NetU1_36: U1.36 U22.2 | length 1094.2
  Top Layer w25: v1(10280,8416) 10280,8760 U22.2
  Bottom Layer w25: U1.36 9866,8456 10240,8456 v1(10280,8416)
VCC: C1.2 C2.2 C7.1 C9.2 ICSP.2 P2.1 P_PICkit.13 P_PWR5.2 P_SPI.2 R1.2 U1.11 U1.32 U2.1 U22.1 | length 10203.6
  Top Layer w21.65: v1@8926.85,6818.15 R1.2 8926.85,7690.85 ; 9797,8520 9836.3,8559.3 9836.3,8565.64 ; 9836.3,8996.3 C1.2 ; 9929.53,7191.53 C2.2 ; 10090.47,8670.47 C9.2 10090.47,8565.64 9836.3,8565.64 ; 9836.3,8565.64 C1.2 ; 9836.3,8565.64 C1.2
  Top Layer w25: P_SPI.2 8415,7053 8415,7452 8520.03,7557.03 8520.03,7838.97 ICSP.2 ; v1@8926.85,6818.15 v1(8927,6818) ; 8926.85,7690.85 9080.5,7844.5 9080.5,8028 9064,8044.5 9064,8446 9104,8486 9104,8704 P2.1 ; C7.1 9163.5,8876.5 P2.1 ; 9797,8520 9723,8520 9513,8730 9310,8730 P2.1 ; 9836.3,8996.3 P_PWR5.2 ; 9929.53,7191.53 9880,7142 9826,7176 9826,7280 9866,7320 9930,7320 U1.11 10270,8060 U1.32 10090.47,8450.47 10090.47,8565.64 C9.2 ; 10090.47,8670.47 U22.1 10122.97,8877.03 10122.97,9340 10190,9407.03 U2.1
  Bottom Layer w25: P_SPI.2 8650,6818 v1(8927,6818) ; U22.1 10263.2,8736.8 10990.2,8736.8 10997.5,8729.5 11218.5,8729.5 11254.5,8765.5 11392.5,8765.5 11395.5,8762.5 11472.5,8762.5 11535,8700 P_PICkit.13
pads on no net: P_USB.5 P_USB.6 U2.13 U2.16 U5.1 U5.8 U6.1 U6.8 U22.13 U22.16

## Keep-outs
Top Layer:
  rectangle: 10780,9300 10820,9340
  region: 10620,9340 10580,9340 10580,9300 10620,9300
  rectangle: 11100,9060 11140,9100
  rectangle: 10840,8600 10880,8640
  region: 11140,8600 11140,8640 11100,8640 11100,8600
  rectangle: 8960,7200 9000,7240
  rectangle: 8687,8271 8727,8311
  rectangle: 8460,8640 8840,8920
  rectangle: 12400,8160 12480,8360
  rectangle: 9780,9680 9860,9880
  rectangle: 8800,6380 11900,6540
  rectangle: 8800,10420 11880,10580
  rectangle: 9210,9857 9315,10025
  rectangle: 9219,9048 9317,9231
  rectangle: 8391,7744 8426,8340
Bottom Layer:
  rectangle: 8800,6380 11920,6540
  rectangle: 8780,10420 11900,10580
  rectangle: 8393,7731 8425,8328
Keep-Out Layer:
  lines w10: 12680,10580 8380,10580 8380,6380 12685.81,6380 12685.81,10580

## Text inside footprints (layer, text, board x,y; h text height)
C6: Top Overlay "+" at 9183.19,9510.47 h59.06
C7: Top Overlay "+" at 9125.12,9110.47 h59.06
C8: Top Overlay "+" at 9125.12,9910.47 h59.06
J1: Mechanical 1 "Mech 2 - Clearance, move to internal plane if present" at 8411.26,10019.44 h11.81; Mechanical 1 "Mech 1 - Slot cut-out" at 8411.26,10039.13 h11.81; Mechanical 1 "Assign keep-out area to slot" at 8411.26,10078.5 h11.81; Mechanical 1 "Alert PCB fab to slot details" at 8411.26,10058.82 h11.81
PO: Top Overlay "5" at 11360,9440 h50 r90; Top Overlay "1" at 11460,9460 h50 r90; Top Overlay "4" at 11460,9900 h50 r90; Top Overlay "8" at 11360,9900 h50 r90
U3: Top Overlay "3" at 8695.32,9338.39 h59.05; Top Overlay "1" at 8695.32,9242.09 h59.05
U3_1: Top Overlay "1" at 8975.32,9242.09 h59.05; Top Overlay "3" at 8975.32,9338.39 h59.05